# Altium PCB V4_with_2101.PcbDoc
Units mm, origin at the board's own origin, x right, y up, seen from the top; angles counter-clockwise.
Board outline 79.76 x 54.86 mm, 2 copper layers (Top Layer, Bottom Layer); 52 components, 21 nets, 127 pads, 7 vias.
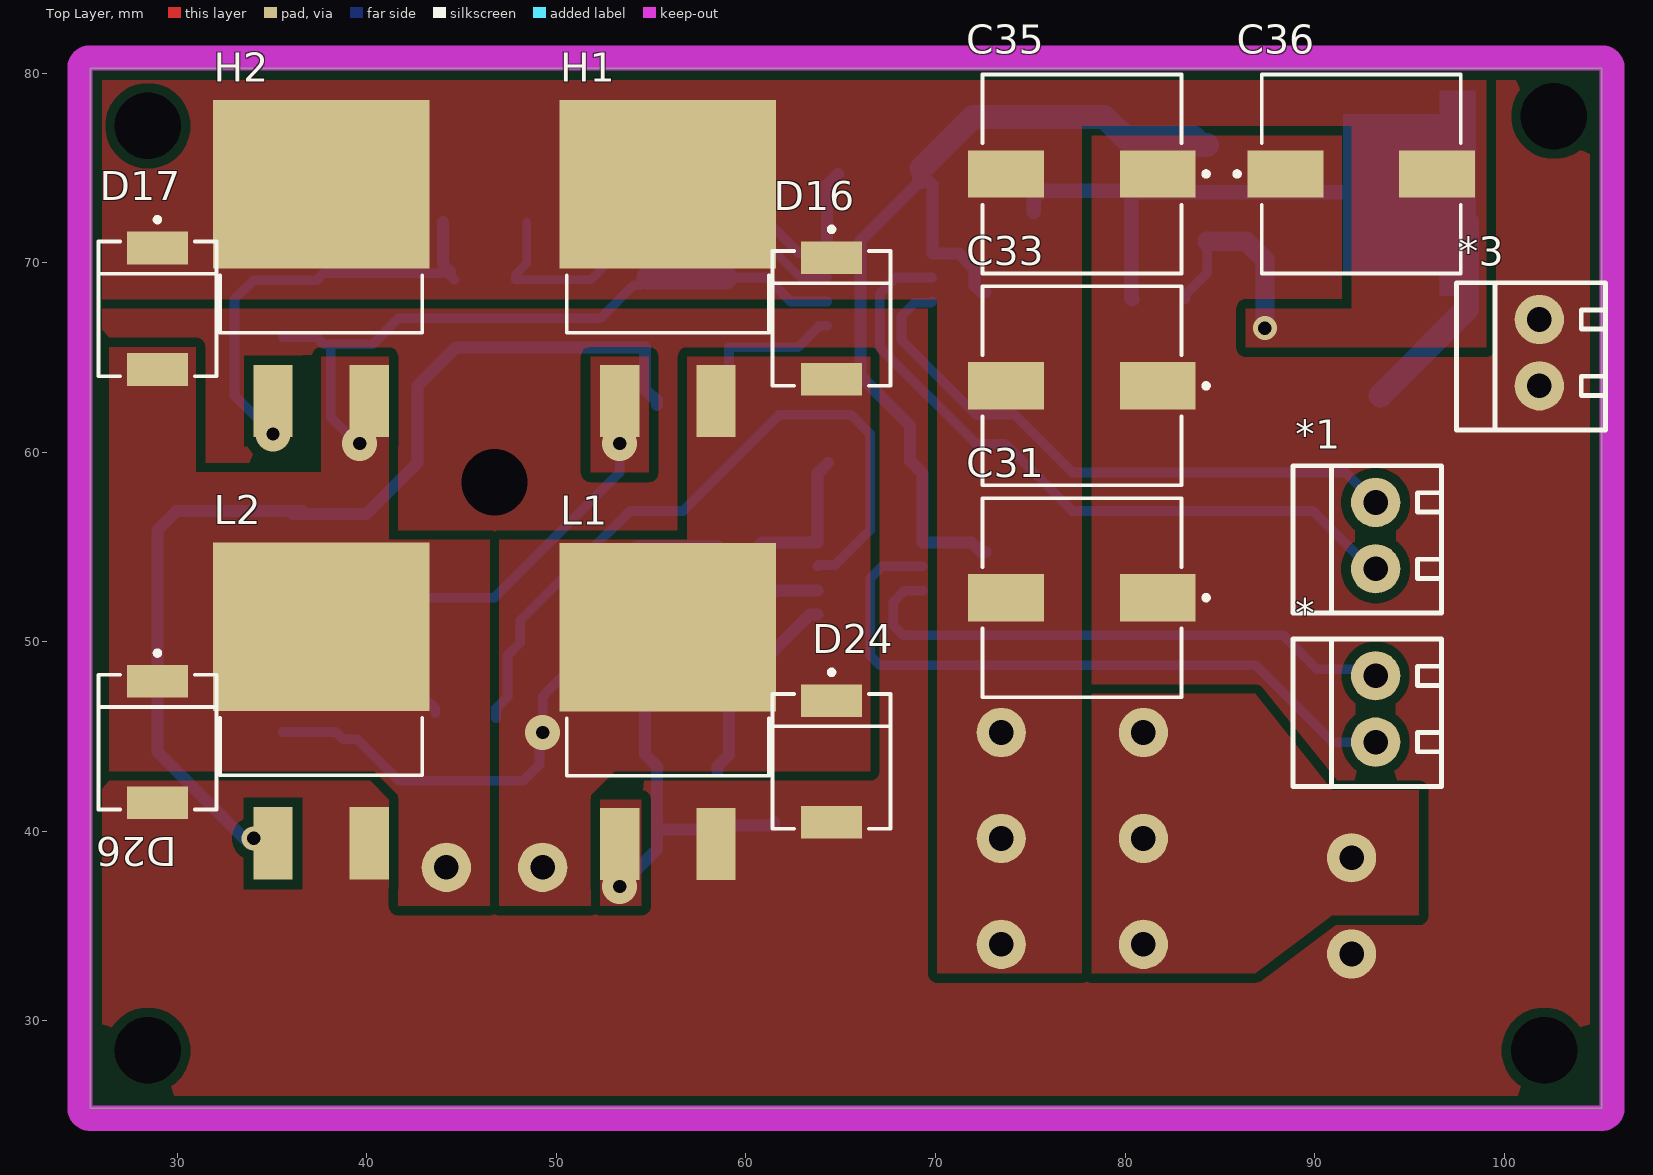
[diagram p0: Top Layer view]
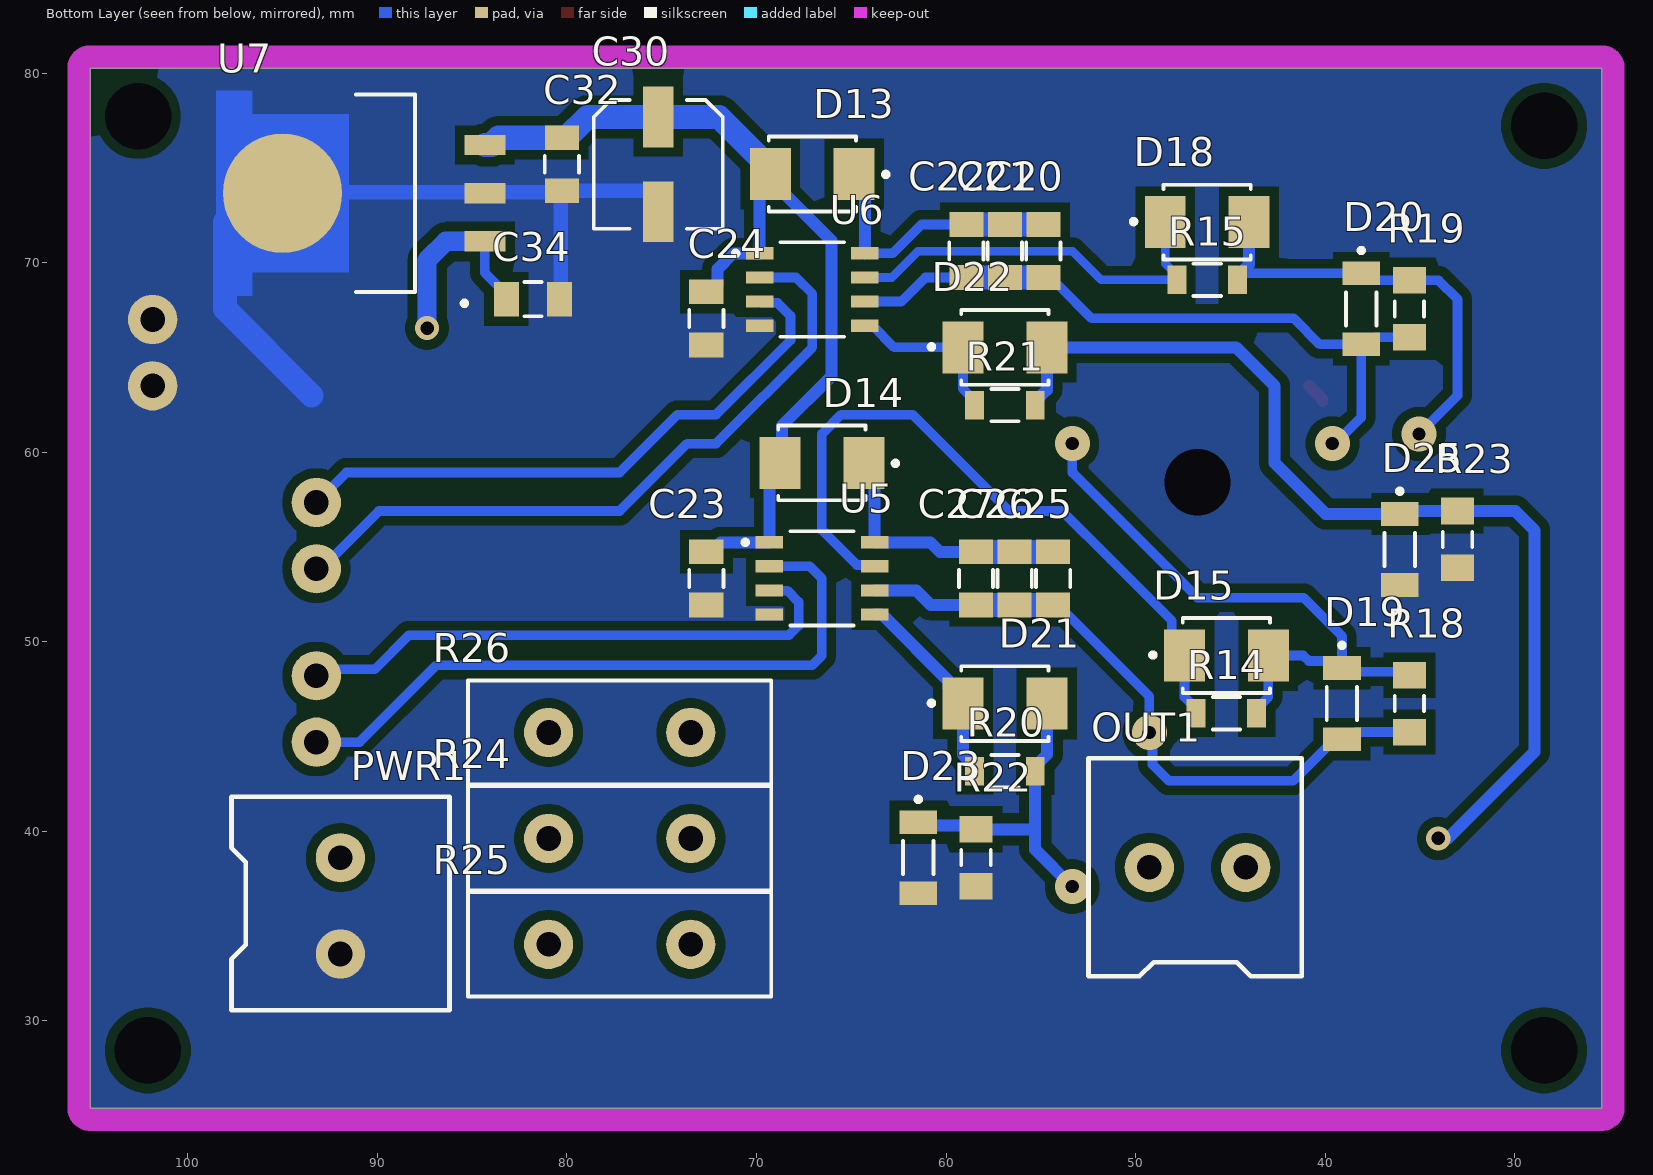
[diagram p1: Bottom Layer view, seen from below]

## Layer stack, top to bottom
Top Solder: solder mask 0.0102, Solder Resist, Dk 3.5
Top Layer: signal copper 0.0356
Dielectric 1: dielectric 0.32, FR-4, Dk 4.8
Bottom Layer: signal copper 0.0356
Bottom Solder: solder mask 0.0102, Solder Resist, Dk 3.5

## Board outline
25.4,25.4 25.4,80.264 105.156,80.264 105.156,25.4

## Design rules (kind name [scope] priority, off if disabled: settings)
Clearance [All] p1: gap=0.508 ignorepadtopadclearanceinfootprint=FALSE except(0: Arc-Hole Track-Hole SMDPad-Hole THPad-Hole Via-Hole Fill-Hole Poly-Hole Region-Hole Text-Hole; 0.381: Arc-Arc Arc-Track Track-Track)
PolygonConnect [All] p1: connectstyle=Direct reliefconductorwidth=0.254 reliefentries=4 polygonreliefangle="90 Angle" airgapwidth=0.254
RoutingVias [All] p1: holewidth=0.711 width=1.27 viastyle="Through Hole" minholewidth=0.711 minwidth=1.27 maxholewidth=0.711 maxwidth=1.27
SolderMaskExpansion [All] p1: expansion=0.102 istentingtop=FALSE
Width [All] p1: maxlimit=1.27 minlimit=0.254 preferedwidth=0.254 minimp=50.000000 maximp=50.000000 favimp=50.000000
30 further rules are at their usual default settings.

## Components (designator, comment, footprint, x,y, rotation, side; value= is the part's Value field where it differs from the comment)
* "KF350-P2" "New footprint 1"#1 92.964,46.228 r90 top
*1 "KF350-P2" "New footprint 1"#1 92.964,55.372 r90 top
*3 "KF350-P2" "New footprint 1"#1 101.6,65.024 r90 top
C20 "12061C474KAT2A" FP-1206-L_3_2_0_2-W_1_6_0-IPC_B 54.864,70.612 r270 bottom
C21 "12061C474KAT2A" FP-1206-L_3_2_0_2-W_1_6_0-IPC_B 56.896,70.612 r270 bottom
C22 "12061C474KAT2A" FP-1206-L_3_2_0_2-W_1_6_0-IPC_B 58.928,70.612 r270 bottom
C23 "12065C104KAT2A" FP-1206-L_3_2_0_2-W_1_6_0-IPC_B 72.644,53.34 r270 bottom
C24 "12065C104KAT2A" FP-1206-L_3_2_0_2-W_1_6_0-IPC_B 72.644,67.056 r270 bottom
C25 "12061C474KAT2A" FP-1206-L_3_2_0_2-W_1_6_0-IPC_B 54.356,53.34 r270 bottom
C26 "12061C474KAT2A" FP-1206-L_3_2_0_2-W_1_6_0-IPC_B 56.388,53.34 r270 bottom
C27 "12061C474KAT2A" FP-1206-L_3_2_0_2-W_1_6_0-IPC_B 58.42,53.34 r270 bottom
C30 "EEE-1VA220SP 22uF 50V" FP-SD-MFG 75.184,75.184 r90 bottom value=22uF
C31 "UWT1V331MNL1GS 330uF 35V smd" FP-UWT1V331MNL1GS-MFG 77.724,52.324 r180 top value=330uF
C32 "12065C104KAT2A" FP-1206-L_3_2_0_2-W_1_6_0-IPC_B 80.264,75.184 r270 bottom
C33 "UWT1V331MNL1GS 330uF 35V smd" FP-UWT1V331MNL1GS-MFG 77.724,63.5 r180 top value=330uF
C34 "12065C104KAT2A" FP-1206-L_3_2_0_2-W_1_6_0-IPC_B 81.788,68.072 r180 bottom
C35 "UWT1V331MNL1GS 330uF 35V smd" FP-UWT1V331MNL1GS-MFG 77.724,74.676 r180 top value=330uF
C36 "UWT1V331MNL1GS 330uF 35V smd" FP-UWT1V331MNL1GS-MFG 92.456,74.676 r0 top value=330uF
D13 "MURS120T3G" FP-403A-03-MFG 67.056,74.676 r0 bottom
D14 "MURS120T3G" FP-403A-03-MFG 66.548,59.436 r0 bottom
D15 "MURS120T3G" FP-403A-03-MFG 45.212,49.276 r180 bottom
D16 "SS34-E3/57T" FP-95402-MFG 64.516,67.056 r270 top
D17 "SS34-E3/57T" FP-95402-MFG 28.956,67.564 r270 top
D18 "MURS120T3G" FP-403A-03-MFG 46.228,72.136 r180 bottom
D19 "TZMC3V3-GS08" FP-6_560-5005_01-4-MFG 39.116,46.736 r270 bottom
D20 "TZMC3V3-GS08" FP-6_560-5005_01-4-MFG 38.1,67.564 r270 bottom
D21 "MURS120T3G" FP-403A-03-MFG 56.896,46.736 r180 bottom
D22 "MURS120T3G" FP-403A-03-MFG 56.896,65.532 r180 bottom
D23 "TZMC3V3-GS08" FP-6_560-5005_01-4-MFG 61.468,38.608 r270 bottom
D24 "SS34-E3/57T" FP-95402-MFG 64.516,43.688 r270 top
D25 "TZMC3V3-GS08" FP-6_560-5005_01-4-MFG 36.068,54.864 r270 bottom
D26 "SS34-E3/57T" FP-95402-MFG 28.956,44.704 r270 top
H1 "IRF3205STRLPBF" FP-PG-TO263-3-MFG 55.88,71.12 r0 top
H2 "IRF3205STRLPBF" FP-PG-TO263-3-MFG 37.592,71.12 r0 top
L1 "IRF3205STRLPBF" FP-PG-TO263-3-MFG 55.88,47.752 r0 top
L2 "IRF3205STRLPBF" FP-PG-TO263-3-MFG 37.592,47.787 r0 top
OUT1 "2 pin terminal klemens" "New footprint 1"#2 46.736,38.1 r180 bottom
PWR1 "2 pin terminal klemens" "New footprint 1"#2 91.948,36.068 r270 bottom
R14 "RC1206JR-0710RL" FP-RC1206-0_65-MFG 45.212,46.228 r180 bottom
R15 "RC1206JR-0710RL" FP-RC1206-0_65-MFG 46.228,69.088 r180 bottom
R18 "Resistor 1k +/-1% 1206 250 mW" RESC3116X70X50ML13T20 35.56,46.736 r270 bottom value=1k
R19 "Resistor 1k +/-1% 1206 250 mW" RESC3116X70X50ML13T20 35.56,67.564 r270 bottom value=1k
R20 "RC1206JR-0710RL" FP-RC1206-0_65-MFG 56.896,43.18 r180 bottom
R21 "RC1206JR-0710RL" FP-RC1206-0_65-MFG 56.896,62.484 r180 bottom
R22 "Resistor 1k +/-1% 1206 250 mW" RESC3116X70X50ML13T20 58.42,38.608 r270 bottom value=1k
R23 "Resistor 1k +/-1% 1206 250 mW" RESC3116X70X50ML13T20 33.02,55.396 r270 bottom value=1k
R24 "20mm Body 7.5mm pitch Thermistor" FP-NTPAD-MFG 77.216,39.624 r180 bottom
R25 "20mm Body 7.5mm pitch Thermistor" FP-NTPAD-MFG 77.216,34.036 r180 bottom
R26 "20mm Body 7.5mm pitch Thermistor" FP-NTPAD-MFG 77.216,45.212 r180 bottom
U5 "IR2101SPBF-BL" FP-PG-DSO-8-MFG 66.548,53.34 r180 bottom
U6 "IR2101SPBF-BL" FP-PG-DSO-8-MFG 67.056,68.58 r180 bottom
U7 "LM7812S/NOPB" FP-KTT0003B-MFG 90.873,73.66 r90 bottom

## Footprints (in the part's own frame and the unit in brackets; to place one, negate y for a bottom-side part, rotate by r counter-clockwise, add the part's x,y. Pads: shape width x height; smd on the part's side, far side on the other; paste and mask are expansions set on the pad)
FP-6_560-5005_01-4-MFG [mm]
  rect 1.25x2 smd paste+0 mask+0: 1(-1.875,0) 2(1.875,0)
  silkscreen extent -3.2,-0.8 0.87,0.8, body extent -1.76,-0.8 1.74,0.8, height 1.59
FP-403A-03-MFG [mm]
  rect 2.159x2.743 smd paste+0 mask+0: 1(-2.21,0) 2(2.21,0)
  silkscreen extent -4,-1.97 2.3,1.97, body extent -2.72,-1.78 2.72,1.78, height 2.47
FP-1206-L_3_2_0_2-W_1_6_0-IPC_B [mm]
  rect 1.305x1.806 smd paste+0 mask+0: 1(-1.401,0) 2(1.401,0)
  silkscreen extent -0.45,-0.9 0.45,0.9, body extent -1.6,-0.8 1.6,0.8, height 1.78
FP-95402-MFG [mm]
  rect 1.72x3.2 smd paste+0 mask+0: 1(-3.205,0) 2(3.205,0)
  silkscreen extent -4.82,-3.11 3.55,3.11, body extent -4.17,-3.21 4.17,3.21, height 0.25
FP-KTT0003B-MFG [mm]
  rect 1.07x2.16 smd paste+0 mask+0: 1(-2.54,-6.545) 2(0,-6.545) 3(2.54,-6.545)
  round 6.291 smd paste+0 mask+0: 4(0,4.13)
  Top Layer region: 5.4,7.625 -5.4,7.625 -5.4,5.715 -4.165,5.715 -4.165,0.635 4.165,0.635 4.165,5.715 5.4,5.715 5.4,7.625
  silkscreen extent -5.93,-5.59 5.21,0.26, body extent -5.08,-7.23 5.08,7.15, height 4.79
FP-NTPAD-MFG [mm]
  round 2.6 hole 1.3 mask+0.051: 1(-3.75,0) 2(3.75,0)
  silkscreen extent -8,-2.75 8,2.75, body extent -8,-2.75 8,2.75, height 26
FP-PG-DSO-8-MFG [mm]
  rect 1.45x0.65 smd paste+0 mask+0: 1(-2.775,1.905) 2(-2.775,0.635) 3(-2.775,-0.635) 4(-2.775,-1.905) 5(2.775,-1.905) 6(2.775,-0.635) 7(2.775,0.635) 8(2.775,1.905)
  silkscreen extent -4.17,-2.49 1.68,2.49, body extent -3,-2.45 3,2.45, height 1.75
FP-PG-TO263-3-MFG [mm]
  rect 2.08x3.81 smd paste+0 mask+0: 1(-2.54,-8.417) 3(2.54,-8.417)
  rect 11.43x8.89 smd paste+0 mask+0: 2(0,3.013)
  silkscreen extent -5.34,-4.82 5.34,-1.81, body extent -5.81,-10.42 5.81,7.56, height 0.25
FP-RC1206-0_65-MFG [mm]
  rect 1x1.5 smd paste+0 mask+0: 1(-1.6,0) 2(1.6,0)
  silkscreen extent -0.72,-0.85 0.72,0.85, body extent -1.6,-0.79 1.62,0.81, height 0.57
FP-SD-MFG [mm]
  rect 3.2x1.6 smd paste+0 mask+0: 1(-2.5,0) 2(2.5,0)
  silkscreen extent -3.4,-3.4 3.4,3.4, body extent -3.5,-3.29 3.5,3.31, height 5.7
FP-UWT1V331MNL1GS-MFG [mm]
  rect 4x2.5 smd paste+0 mask+0: 1(-4,0) 2(4,0)
  silkscreen extent -6.68,-5.25 5.25,5.25, body extent -6.25,-5.5 6.25,5.5, height 0.25
"New footprint 1"#1 [mm]
  round 2.6 hole 1.3 mask+0.051: 1(-1.524,-0.254) 2(1.976,-0.254)
  silkscreen extent -3.86,-3.73 3.91,4.11, body extent -3.67,-3.6 3.73,3.9, height 10
"New footprint 1"#2 [mm]
  round 2.6 hole 1.3 mask+0.051: 1(-2.54,0) 2(2.54,0)
  silkscreen extent -5.75,-5.75 5.5,5.75, body extent -5.5,-5.6 5.23,5.6, height 19.34
RESC3116X70X50ML13T20 [mm] "Chip Resistor, 2-Leads, Body 3.25x1.65mm, IPC Low Density"
  rect 1.4x1.75 smd: 1(-1.5,0) 2(1.5,0)
  silkscreen extent -0.4,-0.77 0.4,0.77, body extent -1.63,-0.82 1.63,0.82, height 0.7

## Part data
* *1 *3: library part CMP-002-00078-2, "3.5mm mini klemens"
C20 C21 C22 C25 C26 C27: library part CMP-000013-1, "1206 470 nF 100 V ±10 % Tolerance X7R Surface Mount Multilayer Ceramic Capacitor"
C23 C24 C32 C34: library part CMP-001-00084-1, "Ceramic capacitor SMD-1206 100nF /50V X7R# K +-10%, AVX, RoHS, /4000 reel/"
C30: library part CMP-000026-1, "Cap Aluminum 22uF 35V 20% (6.3 X 5.4mm) SMD 60mA 2000h 85 C T/R", Case/Package=Radial, Construction=Cylindrical, Diameter=6.3mm
C31 C33 C35 C36: library part CMP-000023-1, "Aluminum Electrolytic Capacitor, 330uF 35 V, WT Series 1000h 10 (Dia.) x 10mm", Case/Package=Radial, Construction=Cylindrical, Diameter=10mm
D13 D14 D15 D18 D21 D22: library part CMP-004-00033-1, "VR=200V IF=2A Trr=35ns"
D16 D17 D24 D26: library part CMP-000005-2, "DIODE SCHOTTKY 40V 3A DO214AB"
D19 D20 D23 D25: library part CMP-000009-1, "DIODE ZENER 3.3V 500MW SOD80"
H1 H2 L1 L2: library part CMP-013-00038-1, "MOSFET N-CH 55V 110A D2PAK"
OUT1 PWR1: library part CMP-002-00072-2, "2 pin terminal klemens pin aralığı 200 mil"
R14 R15 R20 R21: library part CMP-000008-1, "Res General Purpose Thick Film 1206 10 Ohm 5% 1/4W ±200ppm/°C Molded SMD Paper T/R"
R18 R19 R22 R23: library part CMP-009-00011-5, "Chip Resistor, 1 KOhm, +/- 1%, 0.25 W, -55 to 155 degC, 1206 (3216 Metric)", Case/Package=1206, Max Operating Temperature=155°C, Min Operating Temperature=-55°C, Power=250mW, Tolerance=1%, Voltage Rating=200V, Mounting Technology=SM, Pins=2, RoHS Compliant=True
R24 R25 R26: library part CMP-009-00184-2
U5 U6: library part CMP-000015-1, "MOSFET DRVR 600V 0.36A 2-OUT Hi/Lo Side Non-Inv 8-Pin SOIC"
U7: library part CMP-04917-000197-1, "IC REG LINEAR 12V 1.5A", Case/Package=TO-263, Dropout Voltage=2V, Max Operating Temperature=125°C, Min Operating Temperature=0°C, Quiescent Current=8mA, Lead Free="Contains Lead", RoHS Compliant=Yes

## Free pads (board coordinates)
  round 1.524 hole 3.5: 1(28.448,28.448) 1(28.448,77.216) 1(46.736,58.42) 1(102.108,28.448) 1(102.616,77.724)

## Via types
v1: diameter 1.851, hole 0.7, Top Layer to Bottom Layer, 5 vias
v2: diameter 1.27, hole 0.711, Top Layer to Bottom Layer, 2 vias

## Nets (pads, with @x,y where several pads share a name; then routed paths per layer and width w, separated by ;. In a path a pad name is that pad's centre, name@x,y a point inside that pad or via, vN(x,y) a via of type N, cw(c..) or ccw(c..) an arc to the next point about the centre after c; other vN are vias at no path point)
+5: 
+12: C23.1 C24.1 C30.2 C32.1 D13.2 D14.2 U5.1 U6.1 U7.3 | length 50.9
  Bottom Layer w0.635: D13.2@69.266,74.384 66.04,71.158 66.04,64.008 68.66,61.388 68.66,59.534 D14.2 69.323,58.871 U5.1 71.889,55.245 72.393,54.741 C23.1 ; D13.2@69.412,74.53 69.831,74.111 U6.1 71.227,70.485 72.058,69.654 72.058,68.792 72.393,68.457 C24.1
  Bottom Layer w1.016: D13.2@69.266,74.384 D13.2 D13.2@69.266,74.968
  Bottom Layer w1.27: D13.2@69.266,74.968 71.982,77.684 C30.2 78.914,77.684 C32.1@80.013,76.585 ; C32.1 83.598,76.585 83.983,76.2 U7.3
BAT: PWR1.1 R24.1 R25.1 R26.1
GND: *3.1 *3.2 C23.2 C24.2 C30.1 C31.1 C32.2 C33.1 C34.2 C35.1 C36.1 D23.2 D24.2 D25.2 D26.2 L1.3 L2.3 pad.1@46.736,58.42 PWR1.2 R22.2 R23.2 U5.4 U6.4 U7.2 U7.4 | length 37.4
  Bottom Layer w0.762: C30.1 75.184,73.364 75.603,73.783 C32.2 C32.2@80.326,73.722 ; C34.2 80.326,68.134 C32.2@80.326,73.722 ; U7.4 94.941,73.722 C32.2@80.326,73.722
  Bottom Layer w1.27: 93.472,62.992 98.044,67.564 98.044,72.136
HG1: D15.2 D19.1 H1.1 R14.2 R18.1 | length 32.2
  Bottom Layer w0.508: R18.1 35.748,48.423 38.928,48.423 D19.1 ; R14.2 43.612,46.478 43.002,47.088 D15.2 41.16,49.276 40.866,48.982 39.487,48.982 D19.1 ; v1(53.34,60.452) 53.34,58.928 46.736,52.324 41.148,52.324 39.116,50.292 D19.1
HG2: D18.2 D20.1 H2.1 R15.2 R19.1 | length 23.1
  Bottom Layer w0.508: v1(35.052,60.96) 33.02,62.992 33.02,68.072 34.012,69.064 37.35,69.064 37.725,69.439 D20.1 44.453,69.439 44.453,69.263 R15.2
  Bottom Layer w0.635: D18.2 44.018,69.892 R15.2@44.39,69.521
HIN1: *.1 U5.2 | length 35.7
  Bottom Layer w0.508: U5.2 67.183,53.975 66.548,53.34 66.548,49.276 67.056,48.768 86.868,48.768 90.932,44.704 *.1
HIN2: *1.1 U6.2 | length 37.3
  Bottom Layer w0.508: U6.2 67.914,69.215 67.056,68.357 67.056,65.532 72.136,60.452 73.66,60.452 77.216,56.896 89.916,56.896 *1.1@93.387,53.425
HO1: D15.1 R14.1 U5.7 | length 37.7
  Bottom Layer w0.508: R14.1@46.812,45.97 46.812,46.478 47.422,47.088 D15.1 48.094,49.948 48.094,51.112 51.308,54.326 53.878,56.896 56.684,56.896 61.764,61.976 65.532,61.976 66.548,60.96 66.548,55.892 64.702,54.046 63.844,54.046 U5.7
HO2: D18.1 R15.1 U6.7 | length 21
  Bottom Layer w0.457: D18.1 48.438,69.948 47.828,69.338 R15.1 51.816,69.088 53.328,70.6 61.48,70.6 62.865,69.215 U6.7
LG1: D21.2 D23.1 L1.1 R20.2 R22.1 | length 16.9
  Bottom Layer w0.635: v1(53.34,37.084) 55.296,39.04 55.296,40.108 ; D21.2 54.686,44.04 R20.2@55.334,43.392 ; R20.2 55.296,40.108 ; R22.1 55.296,40.108 ; R22.1@58.42,40.295 61.468,40.295 D23.1
LG2: D22.2 D25.1 L2.1 R21.2 R23.1 | length 54.2
  Bottom Layer w0.635: v2@33.528,39.624 28.956,44.196 28.956,55.88 29.972,56.896 R23.1 36.068,56.896 D25.1@36.576,56.896 ; D25.1 36.576,56.739 39.975,56.739 42.672,59.436 42.672,63.5 44.704,65.532 D22.2 54.686,63.288 55.058,62.917 55.113,62.917 55.296,62.734 R21.2
  other v2: 34.036,39.624
LIN1: *.2 U5.3 | length 29.6
  Bottom Layer w0.508: U5.3 69.316,52.697 68.368,52.697 67.773,52.102 67.773,50.858 68.282,50.348 88.336,50.348 90.137,48.547 92.875,48.547 *.2
LIN2: *1.2 U6.3 | length 31.8
  Bottom Layer w0.508: U6.3 69.76,67.874 68.89,67.874 68.208,67.192 68.208,65.904 72.136,61.976 74.168,61.976 77.216,58.928 91.638,58.928 *1.2
LO1: D21.1 R20.1 U5.5 | length 10.7
  Bottom Layer w0.635: R20.1 58.496,43.43 59.106,44.04 D21.1 59.868,47.498 59.868,47.93 63.373,51.435 U5.5
LO2: D22.1 R21.1 U6.5 | length 8.9
  Bottom Layer w0.508: R21.1 58.496,62.734 59.106,63.344 D22.1 62.738,65.532 63.881,66.675 U6.5
VB1: C25.1 C26.1 C27.1 D14.1 U5.8 | length 14.1
  Bottom Layer w0.635: C27.1 60.329,54.741 60.833,55.245 U5.8 63.773,58.871 D14.1
  Bottom Layer w1.27: C25.1 C26.1 C27.1
VB2: C20.1 C21.1 C22.1 D13.1 U6.8 | length 14.5
  Bottom Layer w0.508: C22.1 61.289,72.013 62.816,70.485 U6.8
  Bottom Layer w0.635: U6.8 64.281,74.111 D13.1
  Bottom Layer w1.27: C20.1 C21.1 C22.1
VCC: C31.2 C33.2 C34.1 C35.2 C36.2 D16.1 D17.1 H1.2 H2.2 R24.2 R25.2 R26.2 U7.1 | length 10.6
  Bottom Layer w0.508: C34.1 83.189,68.323 84.328,69.462 U7.1
  Bottom Layer w1.016: U7.1 86.39,71.12 87.376,70.134 v2(87.376,66.548)
VS1: C25.2 C26.2 C27.2 D16.2 D19.2 D24.1 H1.3 L1.2 OUT1.1 R18.2 U5.6 | length 35.4
  Bottom Layer w0.508: R18.2 38.366,45.236 38.741,44.861 D19.2 39.491,44.861 41.68,42.672 48.26,42.672 49.113,43.525 49.113,45.049 v1(49.276,45.212) 49.276,47.11 54.105,51.939 C25.2
  Bottom Layer w0.635: C27.2 60.806,51.939 61.572,52.705 U5.6
  Bottom Layer w1.27: C25.2 C26.2 C27.2
VS2: C20.2 C21.2 C22.2 D17.2 D20.2 D26.1 H2.3 L2.2 OUT1.2 R19.2 U6.6 | length 37.9
  Top Layer w0.635: H2.3 40.132,62.777 H2.3@40.855,63.5
  Bottom Layer w0.508: R19.2 37.35,66.064 37.725,65.689 D20.2 ; v1(39.624,60.452) 39.479,60.452 38.1,61.831 D20.2 ; C20.2 54.466,68.813 54.081,68.813 52.324,67.056 41.656,67.056 40.289,65.689 D20.2 ; C22.2 61.096,69.211 62.362,67.945 U6.6
  Bottom Layer w1.27: C20.2 C21.2 C22.2

## Polygon pours and split planes (outlines as drawn)
GND on Top Layer "GND_L01_P035" (solid, remove dead copper, pour order 35): 25.4,80.264 25.4,25.4 105.156,25.4 105.156,80.264
VS2 on Top Layer "VS2_L01_P001" (solid, pour order 1): 26.416,43.18 40.386,43.18 41.656,41.91 41.656,36.068 46.482,36.068 46.482,55.372 26.416,55.372
LG1 on Top Layer "LG1_L01_P002" (solid, pour order 2): 52.324,41.656 54.487,41.656 54.487,36.068 52.324,36.068
HG1 on Top Layer "HG1_L01_P004" (solid, pour order 4): 51.816,65.024 54.864,65.024 54.864,58.928 51.816,58.928
VCC on Top Layer "VCC_L01_P024" (solid, pour order 24): 77.724,32.512 77.724,77.216 25.908,77.216 25.908,68.072 70.104,68.072 70.104,32.512
VCC on Top Layer "VCC_L01_P032" (solid, pour order 32): 91.948,73.221 99.06,73.221 99.06,79.825 25.908,79.825 25.908,77.216 91.948,77.216
VCC on Top Layer "VCC_L01_P005" (solid, pour order 5): 86.36,67.564 86.36,65.532 99.06,65.532 99.06,73.221 91.948,73.221 91.948,67.564
VS2 on Top Layer "VS2_L01_P012" (solid, pour order 12): 26.416,65.532 30.988,65.532 30.988,58.928 37.592,58.928 37.592,55.372 26.416,55.372
VS1 on Top Layer "VS1_L01_P014" (solid, pour order 14): 66.548,55.372 66.548,65.024 60.96,65.024 56.896,65.024 56.896,55.372
VS1 on Top Layer "VS1_L01_P031" (solid, pour order 31): 66.548,43.18 53.086,43.18 51.816,41.91 51.816,36.068 46.99,36.068 46.99,55.372 66.548,55.372
VS1 on Top Layer "VS1_L01_P027" (solid, pour order 27): 56.896,64.77 59.944,64.77 59.944,55.118 56.896,55.118
VS2 on Top Layer "VS2_L01_P034" (solid, pour order 34): 37.592,65.024 37.592,52.832 41.148,52.832 41.148,65.024
BAT on Top Layer "BAT_L01_P033" (solid, pour order 33): 95.504,35.56 90.932,35.56 88.9,34.036 86.868,32.512 78.232,32.512 78.232,47.244 86.868,47.244 90.932,42.164 95.504,42.164
GND on Bottom Layer "GND_L02_P028" (solid, remove dead copper, pour order 28): 25.4,80.264 25.4,25.4 105.156,25.4 105.156,80.264

## Keep-outs
Top Layer:
  the board outline again, w0.25
Keep-Out Layer:
  lines w1.2: 24.8,25.4 ccw(c25.4,25.4) 25.4,24.8 ; 24.8,25.4 ccw(c25.4,25.4) 25.4,24.8 ; 24.8,25.4 24.8,80.264 ; 24.8,80.264 cw(c25.4,80.264) 25.4,80.864 ; 24.8,80.264 cw(c25.4,80.264) 25.4,80.864 ; 25.4,24.8 105.156,24.8 ; 25.4,80.864 105.156,80.864 ; 105.156,24.8 ccw(c105.156,25.4) 105.756,25.4 ; 105.156,24.8 ccw(c105.156,25.4) 105.756,25.4 ; 105.156,80.864 cw(c105.156,80.264) 105.756,80.264 ; 105.156,80.864 cw(c105.156,80.264) 105.756,80.264 ; 105.756,25.4 105.756,80.264

## Dimensions
25.4,25.4 to 25.4,80.264 on Top Layer
105.156,80.264 to 25.4,80.264 on Top Layer